# Altium PCB IR2.PcbDoc
Units mm, origin at the board's own origin, x right, y up, seen from the top; angles counter-clockwise.
Board outline 25.1 x 19.99 mm, 2 copper layers (Top Layer, Bottom Layer); 16 components, 0 nets, 40 pads, 125 vias.
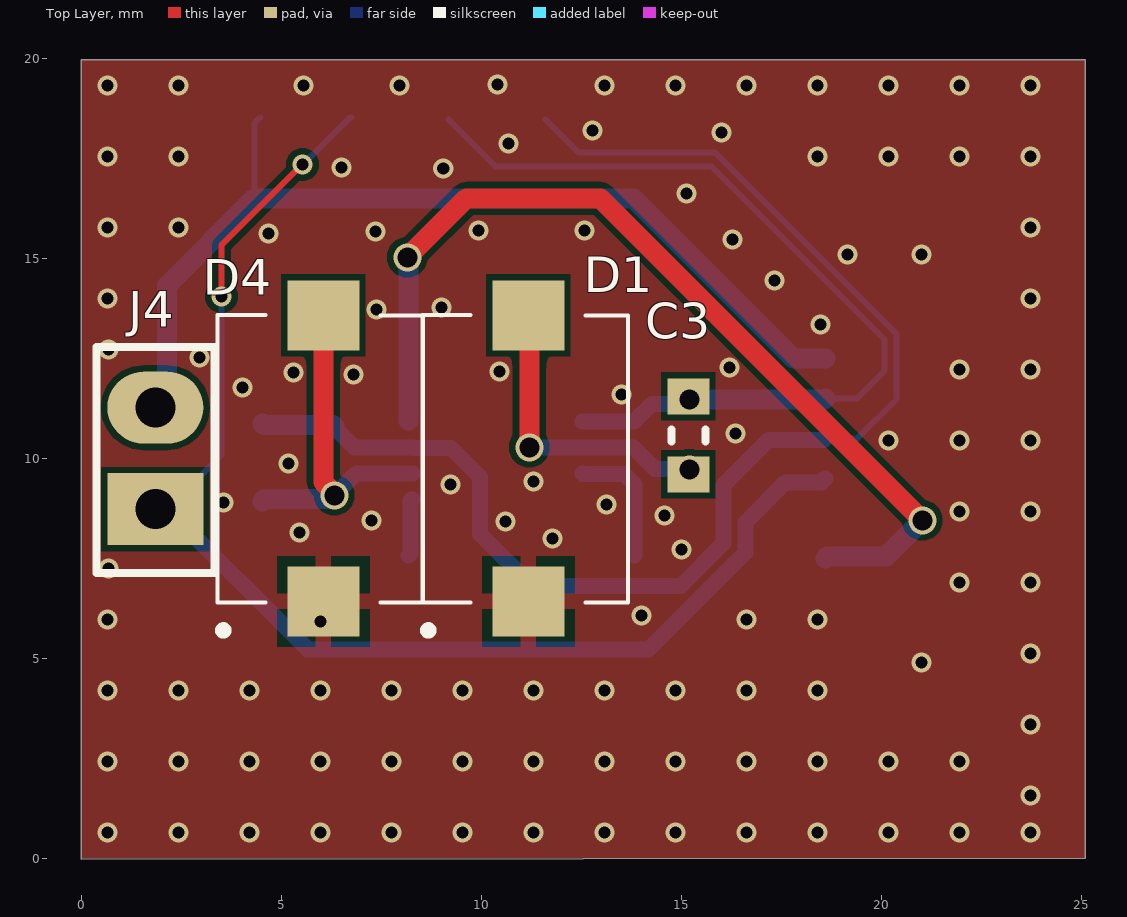
[diagram p0: Top Layer view]
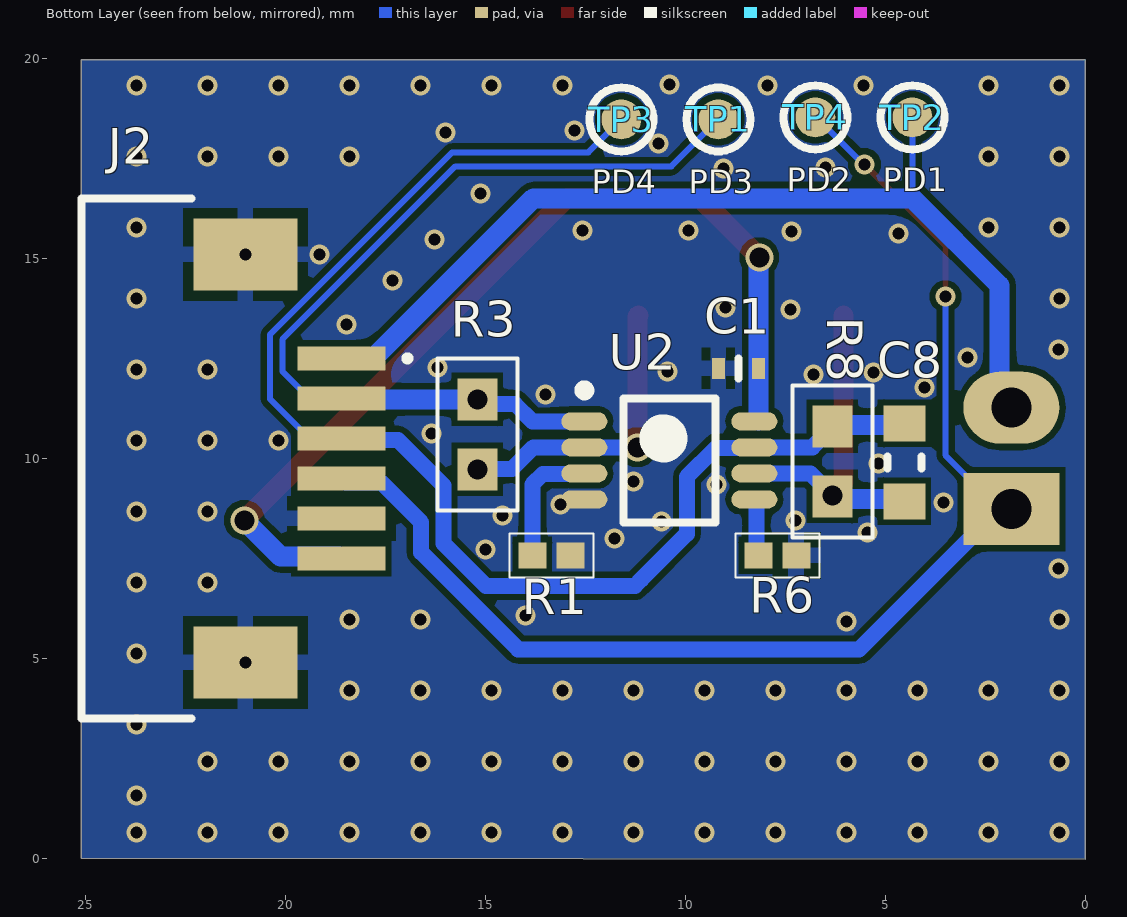
[diagram p1: Bottom Layer view, seen from below]

## Layer stack, top to bottom
Top Solder: solder mask 0.0102, Solder Resist, Dk 3.5
Top Layer: signal copper 0.0356
Dielectric 1: dielectric 0.32, FR-4, Dk 4.8
Bottom Layer: signal copper 0.0356
Bottom Solder: solder mask 0.0102, Solder Resist, Dk 3.5

## Board outline
0,-0.025 0,19.94 0,19.965 25.1,19.965 25.1,0

## Design rules (kind name [scope] priority, off if disabled: settings)
Clearance [All] p1: gap=0.254 ignorepadtopadclearanceinfootprint=FALSE
PolygonConnect [All] p1: connectstyle=Relief reliefconductorwidth=0.254 reliefentries=4 polygonreliefangle="90 Angle" airgapwidth=0.254
RoutingVias [All] p1: holewidth=0.711 width=1.27 viastyle="Through Hole" minholewidth=0.711 minwidth=1.27 maxholewidth=0.711 maxwidth=1.27
SolderMaskExpansion [All] p1: expansion=0.102 istentingtop=FALSE
Width [All] p1: maxlimit=0.254 minlimit=0.254 preferedwidth=0.254
30 further rules are at their usual default settings.

## Components (designator, comment, footprint, x,y, rotation, side; value= is the part's Value field where it differs from the comment)
C1 "MLCC" CAPC1005X06L 8.675,12.25 r0 bottom value=100nF
C3 "MLCC" CAPC1608X09M 15.175,10.575 r90 top value=20pF
C8 "MLCC" CAPC1608X09M 4.525,9.9 r90 bottom value=20pF
D1 "VBPW34S" VBPW34S 11.175,10 r90 top
D4 "VBPW34S" VBPW34S 6.05,10 r90 top
J2 "68610614422" 68610614422 19.8,10 r270 bottom
J4 "2.54mm jumper" FP_Jumper_2x2_54mm 1.85,10 r270 top
R1 "Chip_Res" RESC1005X04M 13.35,7.575 r0 bottom value=3.3kR
R3 "Chip_Res" RESC1608X06M 15.2,10.6 r270 bottom value=887R
R6 "Chip_Res" RESC1005X04M 7.7,7.575 r0 bottom value=3.3kR
R8 "Chip_Res" RESC1608X06M 6.325,9.925 r270 bottom value=887R
TP1 "TP" FP-TP_SMD_Narrow 9.175,18.475 r180 bottom
TP2 "TP" FP-TP_SMD_Narrow 4.325,18.525 r90 bottom
TP3 "TP" FP-TP_SMD_Narrow 11.6,18.475 r90 bottom
TP4 "TP" FP-TP_SMD_Narrow 6.75,18.525 r90 bottom
U2 "2Channel OPAMP Comp" TSOP65P490X110-8L 10.4,9.95 r180 bottom

## Footprints (in the part's own frame and the unit in brackets; to place one, negate y for a bottom-side part, rotate by r counter-clockwise, add the part's x,y. Pads: shape width x height; smd on the part's side, far side on the other; paste and mask are expansions set on the pad)
68610614422 [mm]
  rect 0.6x2.2 smd: 1(-2.5,1.2) 2(-1.5,1.2) 3(-0.5,1.2) 4(0.5,1.2) 5(1.5,1.2) 6(2.5,1.2)
  rect 1.8x2.6 smd: MP1(-5.1,-1.2) MP2(5.1,-1.2)
  silkscreen extent -6.5,-5.3 6.5,2.9, body extent -6.5,-5.1 6.5,2, height 3.01
CAPC1005X06L [mm] "Chip Capacitor, 2-Leads, Body 1.00x0.50mm, IPC High Density"
  rect 0.32x0.52 smd: 1(-0.5,0) 2(0.5,0)
  silkscreen extent 0,-0.25 0,0.25, body extent -0.53,-0.28 0.53,0.28, height 0.55
CAPC1608X09M [mm] "Chip Capacitor, 2-Leads, Body 1.60x0.80mm, IPC Low Density"
  rect 0.9x1.05 smd: 1(-0.975,0) 2(0.975,0)
  silkscreen extent -0.15,-0.43 0.15,0.43, body extent -0.85,-0.45 0.85,0.45, height 0.9
FP-TP_SMD_Narrow [mm]
  round 1 smd: NODE(0,0)
  silkscreen extent -0.8,-0.8 0.8,0.8
FP_Jumper_2x2_54mm [mm]
  oval 1.8x2.4 hole 1: 1(-1.27,0)
  rect 1.8x2.4 hole 1: 2(1.27,0)
  silkscreen extent -2.78,-1.48 2.87,1.48, body extent -2.52,-1.26 2.56,1.28, height 8.45
RESC1005X04M [mm] "Chip Resistor, 2-Leads, Body 1.00x0.50mm, IPC Low Density"
  rect 0.7x0.65 smd: 1(-0.475,0) 2(0.475,0)
  silkscreen extent -1.05,-0.55 1.05,0.55, body extent -0.53,-0.28 0.53,0.28, height 0.4
RESC1608X06M [mm] "Chip Resistor, 2-Leads, Body 1.60x0.80mm, IPC Low Density"
  rect 1.05x1 smd: 1(-0.875,0) 2(0.875,0)
  silkscreen extent -1.9,-1 1.9,1, body extent -0.85,-0.45 0.85,0.45, height 0.55
TSOP65P490X110-8L [mm] "TSOP, 8-Leads, Body 3.00x3.00mm, Pitch 0.65mm, IPC High Density"
  oval 1.15x0.45 smd: 1(-2.125,0.975) 2(-2.125,0.325) 3(-2.125,-0.325) 4(-2.125,-0.975) 5(2.125,-0.975) 6(2.125,-0.325) 7(2.125,0.325) 8(2.125,0.975)
  silkscreen extent -2.25,-1.55 1.15,1.87, body extent -2.52,-1.55 2.52,1.55, height 1.16
VBPW34S [mm]
  rect 1.75x1.8 smd: 1(-3.575,0) 2(3.575,0)
  silkscreen extent -4.38,-2.5 3.58,2.65, body extent -3.35,-2.2 3.35,2.2, height 1.3

## Part data
C1: library part CC0402KRX7R8BB104, "Multilayer Ceramic Capacitor, 0.1 uF, 25 V, ± 10%, X7R, 0402 [1005 Metric]", Case Code (Imperial)=0402, Case Code (Metric)=1005, Dielectric=X7R, Manufacturer=Yageo, Supplier Part Number=311-2077-6-ND, Tolerance=10%, Voltage Rating=25V, Case/Package=0402, Category="Ceramic Capacitors", ID=1, Manufacturer Part Number=CC0402KRX7R8BB104, Part Number=CC0402KRX7R8BB104, Series=CC, Supplier=Digikey, Table="MLCC 0402"
C3 C8: library part CC0603JRNPO9BN200, "Multilayer Ceramic Capacitor, 20 pF, 50 V, ± 5%, C0G (NP0), 0603 [1608 Metric]", Case Code (Imperial)=0603, Case Code (Metric)=1608, Dielectric="C0G, NP0", Manufacturer=Yageo, Supplier Part Number=311-1424-6-ND, Tolerance=5%, Voltage Rating=50V, Case/Package=0603, Category="Ceramic Capacitors", ID=17, Manufacturer Part Number=CC0603JRNPO9BN200, Part Number=CC0603JRNPO9BN200, Series=CC, Supplier=Digikey, Table="MLCC 0603"
D1 D4: "Photodiode 940nm 100ns 130° 2-SMD, Gull Wing", Manufacturer=Vishay, Supplier Part Number=751-1500-2-ND, Category=Photodiodes, ID=1, Manufacturer Part Number=VBPW34S, Part Number=VBPW34S, RoHS=Yes, Supplier=Digikey, Table="Light Pipe"
J2: "6 Position FPC Connector Contacts, Bottom 0.039\" (1.00mm) Surface Mount, Right Angle", Manufacturer="Würth Elektronik", Supplier Part Number=732-1994-2-ND, Category="FFC, FPC (Flat Flexible) Connector Assemblies", Contact Material="Phosphor Bronze", Contact Plating=Tin, ID=1, Manufacturer Part Number=68610614422, Orientation="Right Angle", Part Number=68610614422, Pins=6, Pitch=1mm, RoHS=Yes, Supplier=Digikey, Table=FCC/FPC
J4: library part Header2x1, "2x2.54mm conventional header as jumper", Category=Connectors, Connector Type=Header, Header Orientation=Straight, ID=19, Number of Levels=1, Number of Positions=2, Number of Rows=2, Part Number=Header2x1, Pitch="0.100\" (2.54mm)", Positions Per Level=2, Table="Header Connector"
R1 R6: library part RC0402JR-073K3L, "SMD Chip Resistor, 3.3 kOhm, ± 5%, 63 mW, 0402 [1005 Metric], Thick Film, General Purpose", Case Code (Imperial)=0402, Case Code (Metric)=1005, Manufacturer=Yageo, Max Operating Temperature=155°C, Min Operating Temperature=-55°C, Power Rating=62.5mW, Resistor Type="Thick Film", Supplier Part Number=311-3.3KJRDKR-ND, Temperature Coefficient=100ppm/°C, Tolerance=5%, Case/Package=0402, Category="Chip SMD Resistors", Features="Moisture Resistant", ID=20, Manufacturer Part Number=RC0402JR-073K3L, Part Number=RC0402JR-073K3L, RoHS=Yes, Series=RC, Supplier=Digikey, Table="Resistor 0402", Termination=SMD/SMT
R3 R8: library part RC0603FR-07887RL, "Res Thick Film 0603 887 Ohm 1% 1/10W ±100ppm/°C Molded SMD SMD Paper T/R", Case Code (Imperial)=0603, Case Code (Metric)=1608, Manufacturer=Yageo, Power Rating=100mW, Resistor Type="Thick Film", Supplier Part Number=311-887HRDKR-ND, Temperature Coefficient=100ppm/°C, Tolerance=1%, Case/Package=0603, Category="Chip SMD Resistors", Features="Moisture Resistant", ID=3, Manufacturer Part Number=RC0603FR-07887RL, Part Number=RC0603FR-07887RL, RoHS=Yes, Series=RC_L, Supplier=Digikey, Table="Resistor 0603"
TP1 TP2 TP3 TP4: library part "Test Point", "A simple test point", ID=3, Part Number="Test Point", Table=Misc
U2: library part OPA2380AIDGKR, Case/Package=VSSOP, Manufacturer="Texas Instruments", Max Operating Temperature=125°C, Min Operating Temperature="- 40 C", Supplier Part Number=296-48627-2-ND, Category="Instrumentation, Op Amps, Buffer Amps", Gain Bandwidth Product=90MHz, ID=0, Manufacturer Part Number=OPA2380AIDGKR, Mounting Technology=SMD/SMT, Part Number=OPA2380AIDGKR, RoHS=Yes, Series=-, Slew Rate="80 V/us", Supplier=Digikey, Table="IC OP-AMP"

## Via types
v1: diameter 0.505, hole 0.305, Top Layer to Bottom Layer, tented both sides, 119 vias
v2: diameter 0.7, hole 0.5, Top Layer to Bottom Layer, tented both sides, 6 vias

## Nets (pads, with @x,y where several pads share a name; then routed paths per layer and width w, separated by ;. In a path a pad name is that pad's centre, name@x,y a point inside that pad or via, vN(x,y) a via of type N, cw(c..) or ccw(c..) an arc to the next point about the centre after c; other vN are vias at no path point)
pads on no net: C1.1 C1.2 C3.1 C3.2 C8.1 C8.2 D1.1 D1.2 D4.1 D4.2 J2.1 J2.2 J2.3 J2.4 J2.5 J2.6 J2.MP1 J2.MP2 J4.1 J4.2 R1.1 R1.2 R3.1 R3.2 R6.1 R6.2 R8.1 R8.2 TP1.NODE TP2.NODE TP3.NODE TP4.NODE U2.1 U2.2 U2.3 U2.4 U2.5 U2.6 U2.7 U2.8
copper on no net: | length 156.9
  Top Layer w0.152: v1(3.5,14.05) 3.5,15.325 v1(5.525,17.35)
  Top Layer w0.5: 6.05,13.575 6.05,9.404 6.325,9.129 v2(6.325,9.075) ; v2(8.15,15.025) 9.625,16.5 12.975,16.5 v2(21.025,8.45) ; 11.175,13.575 11.2,13.55 v2(11.2,10.275)
  Bottom Layer w0.152: 1.85,8.73 2.15,8.73 3.5,10.08 v1(3.5,14.05) ; 4.325,16.5 4.325,18.375 4.475,18.525 ; 5.525,16.525 5.55,16.5 ; v1(5.525,17.35) 5.55,17.35 6.725,18.525 6.75,18.525 ; 9.175,18.475 10.35,17.3 15.75,17.3 20.075,12.975 20.075,12.175 19.624,11.724 19.4,11.5 18.6,11.5 ; 11.6,18.475 12.425,17.65 15.831,17.65 20.38,13.101 20.38,11.48 19.4,10.5 18.6,10.5
  Bottom Layer w0.4: 2.15,8.73 5.655,5.225 14.181,5.225 16.605,7.649 16.605,8.403 17.602,9.4 18.5,9.4 18.6,9.5 ; v2@6.325,9.05 v2(6.325,9.075) 6.875,9.625 8.275,9.625 ; 6.325,10.8 6.325,10.775 6.825,10.275 8.275,10.275 8.285,10.265 9.235,10.265 9.961,9.539 9.961,8.114 11.101,6.974 11.259,6.816 14.991,6.816 16.052,7.877 16.052,9.327 17.188,10.463 18.563,10.463 18.6,10.5 ; 8.175,7.575 8.225,7.625 8.225,8.952 8.248,8.975 8.275,8.975 ; v2(11.2,10.275) 12.525,10.275 13.8,10.275 14.334,9.741 15.184,9.741 v2(15.2,9.725) ; 12.525,9.625 12.535,9.615 13.56,9.615 13.825,9.35 13.825,7.575 ; 12.525,10.925 13.825,10.925 14.259,11.359 15.084,11.359 v2(15.2,11.475)
  Bottom Layer w0.5: 1.85,11.27 2.145,11.565 2.145,14.32 4.325,16.5 5.55,16.5 13.8,16.5 17.75,12.55 17.8,12.5 18.6,12.5 ; 4.525,8.925 4.588,8.988 6.262,8.988 v2@6.325,9.05 ; 4.525,10.875 4.563,10.838 6.288,10.838 6.325,10.8 ; v2(8.15,15.025) 8.175,15 8.175,12.25 8.175,10.95 ; v2(15.2,11.475) 18.575,11.475 18.6,11.5 ; 18.6,7.5 18.65,7.55 20.125,7.55 v2(21.025,8.45)
  other v1: 0.65,0.65 2.425,0.65 4.2,0.65 5.975,0.65 7.75,0.65 9.525,0.65 11.3,0.65 13.075,0.65 14.85,0.65 16.625,0.65 18.4,0.65 20.175,0.65 21.95,0.65 23.725,0.65 23.725,1.575 0.65,2.425 2.425,2.425 4.2,2.425 5.975,2.425 7.75,2.425 9.525,2.425 11.3,2.425 13.075,2.425 14.85,2.425 16.625,2.425 18.4,2.425 20.175,2.425 21.95,2.425 23.725,3.35 0.65,4.2 2.425,4.2 4.2,4.2 5.975,4.2 7.75,4.2 9.525,4.2 11.3,4.2 13.075,4.2 14.85,4.2 16.625,4.2 18.4,4.2 21,4.9 23.725,5.125 5.975,5.925 0.65,5.975 16.625,5.975 18.4,5.975 14,6.075 21.95,6.9 23.725,6.9 0.675,7.25 15,7.725 11.775,8 5.45,8.15 10.6,8.425 7.25,8.45 14.575,8.575 21.95,8.675 23.725,8.675 13.125,8.85 3.55,8.9 9.225,9.35 11.3,9.425 5.175,9.875 20.175,10.45 21.95,10.45 23.725,10.45 16.35,10.625 13.5,11.6 4.025,11.775 6.8,12.1 5.3,12.15 10.45,12.175 21.95,12.225 23.725,12.225 16.2,12.275 2.95,12.525 0.675,12.725 18.475,13.35 7.375,13.725 9,13.775 0.65,14 23.725,14 17.325,14.45 19.15,15.1 21,15.1 16.275,15.475 4.675,15.625 7.35,15.675 9.925,15.7 12.575,15.7 0.65,15.775 2.425,15.775 23.725,15.775 15.125,16.625 9.047,17.247 6.5,17.275 0.65,17.55 2.425,17.55 18.4,17.55 20.175,17.55 21.95,17.55 23.725,17.55 10.675,17.875 16,18.15 12.775,18.2 0.65,19.325 2.425,19.325 5.55,19.325 7.95,19.325 13.075,19.325 14.85,19.325 16.625,19.325 18.4,19.325 20.175,19.325 21.95,19.325 23.725,19.325 10.4,19.35

## Polygon pours and split planes (outlines as drawn)
no net on Bottom Layer "NONET_L02_P000" (solid, remove dead copper, pour order 0): 25.1,19.975 25.075,19.975 0,19.975 0,0 25.1,0
no net on Top Layer "NONET_L01_P001" (solid, remove dead copper, pour order 1): 25.1,20 25.075,19.975 0,19.975 0,0 25.1,0

## Silkscreen, mask and mechanical layers (free items; w line width, h text height)
Bottom Overlay:
  text "PD1" at 5.06,16.475 h1
  text "PD2" at 7.46,16.475 h1
  text "PD3" at 9.91,16.433 h1
  text "PD4" at 12.335,16.425 h1
Board:
  lines w0.2: 0,0 0,19.965 25.1,19.965 25.1,0 0,0